# EAGLE board supply LF (EAGLE 7.1.0)
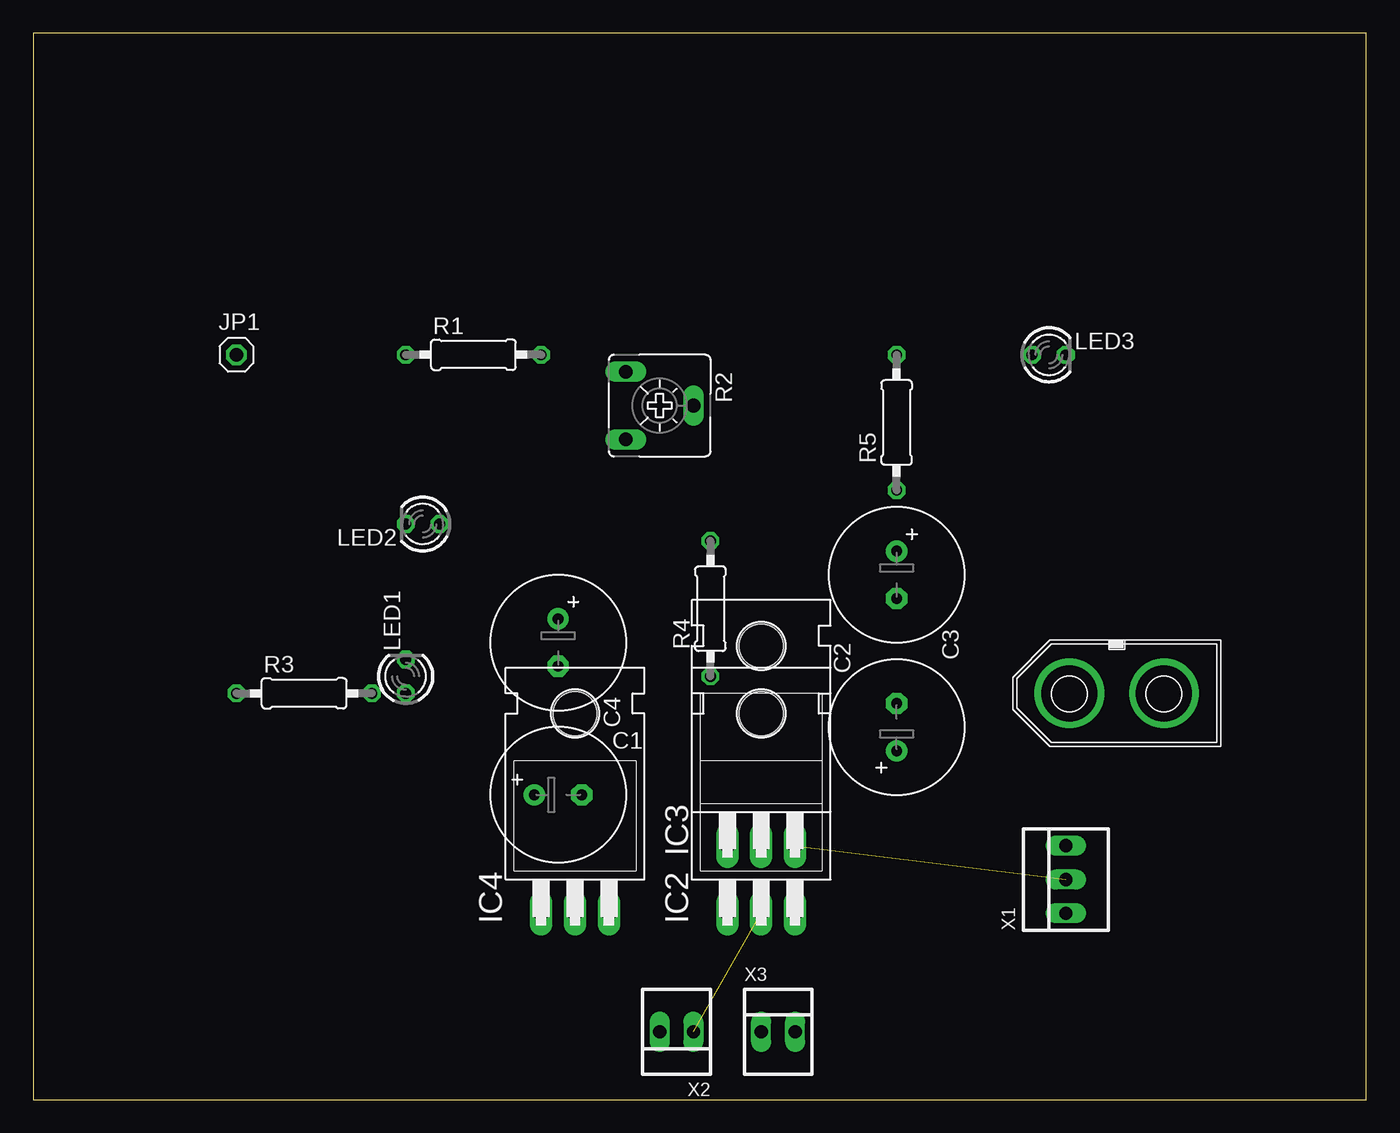
[diagram p0: board, top side]
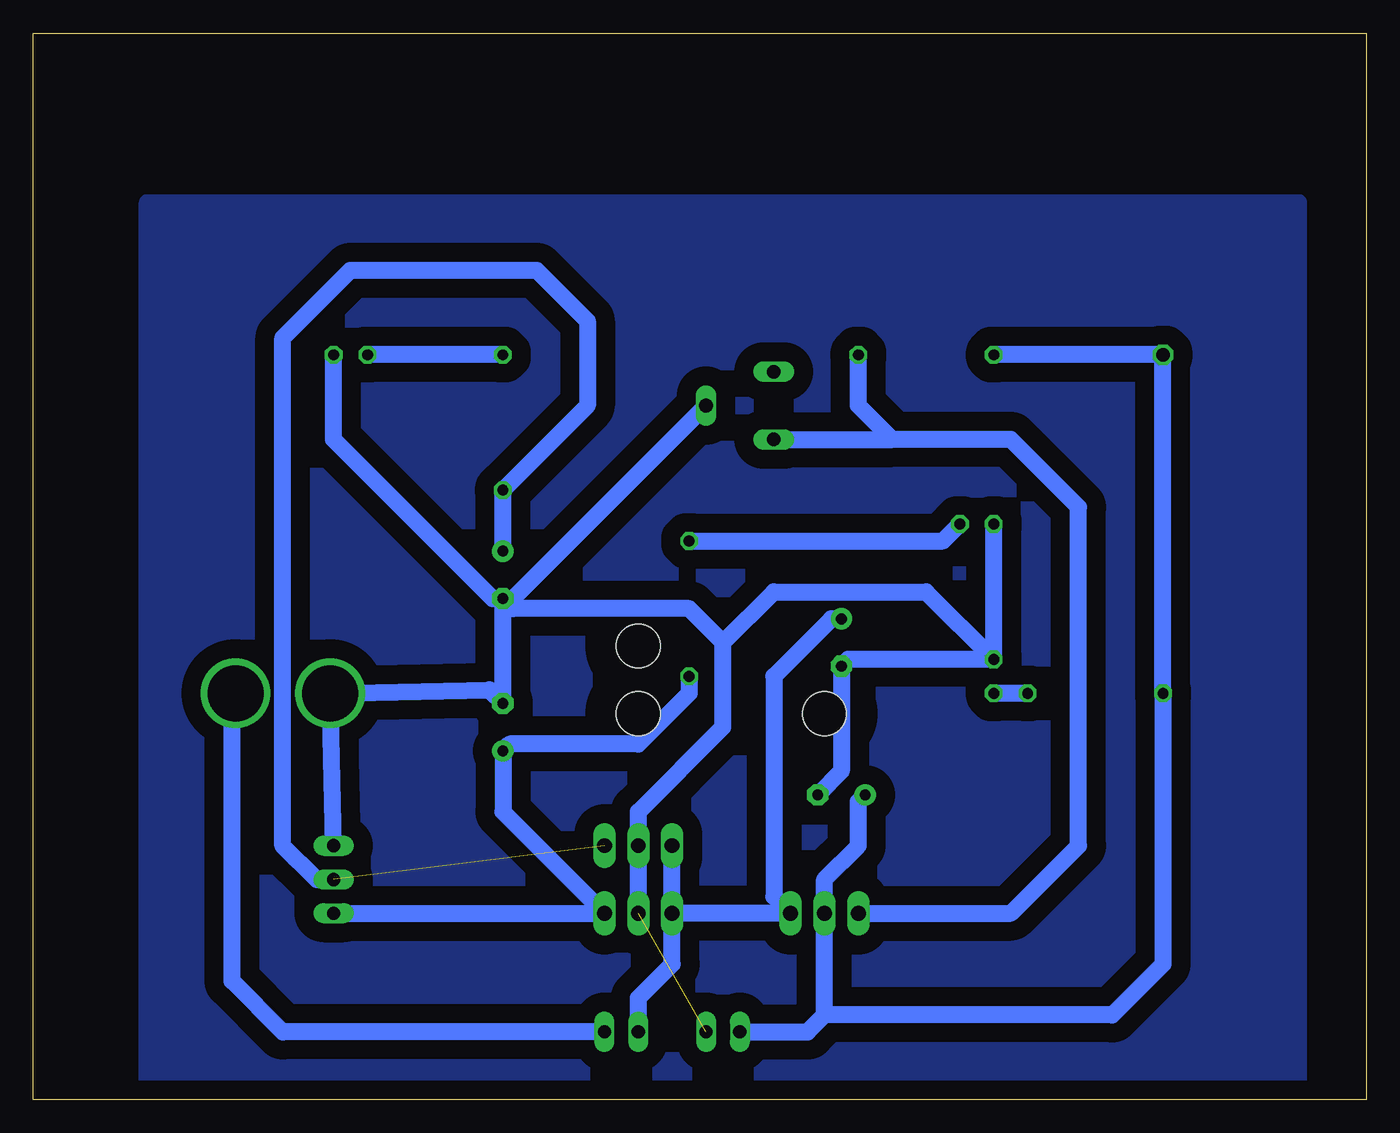
[diagram p1: board, bottom side, seen from below]

Size 100 x 80 mm. Coordinates in mm from the lower left corner, seen from the top.
Outline: 0,0 100,0 100,80 0,80 0,0
Copper layers (1*16): Top 0.035mm / dielectric 1.5mm / Bottom 0.035mm
Design rules "default": minimum track width 10mil, minimum drill 24mil, track to track 8mil, track to pad 8mil, pad to pad 8mil, via to via 8mil, smd to smd 8mil, copper to edge 40mil, drill to drill 8mil, minimum pad ring 10mil, minimum via ring 8mil, stop-mask expansion 4mil, vias tented up to drill 0mil, thermal gap 10mil

## Footprints (pad centres in the part's own frame; a part is rotated, then mirrored left to right if it is on the bottom)
E3,5-10 = drill 0.813 pad 1.6: + -1.778,0 | drill 0.813 pad 1.6 octagon: - 1.778,0
TO220H = drill 1.118 long: 1 -2.54,-10.16; 2 0,-10.16; 3 2.54,-10.16 | hole 3.302: 0,4.826
1X01 = drill 1.016 octagon: 1 0,0
LED3MM = drill 0.813 octagon: A -1.27,0; K 1.27,0
0207/10 = drill 0.813 octagon: 1 -5.08,0; 2 5.08,0
CA6V = drill 1.016 long: A -2.54,-2.54; E 2.54,-2.54; S 0,2.54
CON-XT60M = drill 4.2: V+ -3.55,0; V- 3.55,0
22-23-2031 = drill 1 long: 1 -2.54,0; 2 0,0; 3 2.54,0
22-23-2021 = drill 1 long: 1 -1.27,0; 2 1.27,0

## Placement (x,y rotation side)
C1  1000uF/16V  [E3,5-10]  39.37,22.86 0 top
C2  1000uF/16V  [E3,5-10]  64.77,27.94 90 top
C3  1000uF/16V  [E3,5-10]  64.77,39.37 270 top
C4  1000uF/16V  [E3,5-10]  39.37,34.29 270 top
IC2  7805T  [TO220H]  54.61,24.13 0 top
IC3  7805T  [TO220H]  54.61,29.21 0 top
IC4  317T  [TO220H]  40.64,24.13 0 top
JP1  [1X01]  15.24,55.88 0 top
LED1  [LED3MM]  27.94,31.75 90 top
LED2  [LED3MM]  29.21,43.18 180 top
LED3  [LED3MM]  76.2,55.88 0 top
R1  1K2  [0207/10]  33.02,55.88 0 top
R2  20K  [CA6V]  46.99,52.07 270 top
R3  1K  [0207/10]  20.32,30.48 0 top
R4  1K  [0207/10]  50.8,36.83 90 top
R5  1K  [0207/10]  64.77,50.8 90 top
VIN  [CON-XT60M]  81.28,30.48 180 top
X1  VSYS  [22-23-2031]  77.47,16.51 90 top
X2  VMOT  [22-23-2021]  48.26,5.08 180 top
X3  switch  [22-23-2021]  55.88,5.08 0 top

## Library data of the parts
C1-C4 R1 R3-R5 = rcl
IC2-IC4 = linear
JP1 = pinhead
LED1-LED3 = led
R2 = pot
VIN = con-XT60M
X1 = con-molex; MF: MOLEX; MPN: 22-23-2031; OC_FARNELL: 1462950; OC_NEWARK: 30C0862
X2 X3 = con-molex; MF: MOLEX; MPN: 22-23-2021; OC_FARNELL: 1462926; OC_NEWARK: 25C3832

## Nets
+12V: C3.+ IC3.3 R5.1 X1.2
GND: C1.- C2.- C3.- C4.- IC2.2 IC3.2 LED1.K LED2.K LED3.K R2.S VIN.V- X1.3 X2.1
N$1: IC4.1 R1.2 R2.E
N$2: LED1.A R3.2
N$3: LED3.A R5.2
N$4: VIN.V+ X3.2
N$5: LED2.A R4.2
VCC: C2.+ IC2.3 R4.1 X1.1
VDD: C1.+ IC4.2 JP1.1 R1.1 R3.1 X2.2
VPP: C4.+ IC2.1 IC3.1 IC4.3 X3.1

## Tracks (layer width: path | path; a pad name or v marks a point on that pad's centre or on a via)
+12V  (1 unrouted)
  Bottom 1.27: C3.+ R5.1 58.42,52.07 58.42,58.42 62.23,62.23 76.2,62.23 81.28,57.15 81.28,19.05 78.74,16.51 X1.2
GND  (1 unrouted)
  Bottom 1.27: LED1.K LED2.K | LED1.K 38.86,33.02 C4.- 39.37,24.64 C1.- | IC2.2 IC3.2 54.61,21.59 48.26,27.94 48.26,34.29 | X1.3 VIN.V- 65.79,30.74 C2.- 64.77,36.83 | 64.77,36.83 C3.- | C3.- 65.53,37.59 77.47,49.53 LED3.K | 48.26,34.29 50.8,36.83 64.01,36.83 C3.- | R2.S 64.77,36.83 | 48.26,34.29 44.45,38.1 33.02,38.1 LED1.K
N$1
  Bottom 1.27: IC4.1 26.67,13.97 21.59,19.05 21.59,44.45 26.67,49.53 35.56,49.53 | 35.56,49.53 38.1,52.07 R1.2 | R2.E 35.56,49.53
N$2
  Bottom 1.27: R3.2 LED1.A
N$3
  Bottom 1.27: R5.2 LED3.A
N$4
  Bottom 1.27: X3.2 81.28,5.08 85.09,8.89 85.09,30.22 VIN.V+
N$5
  Bottom 1.27: R4.2 31.75,41.91 LED2.A
N$6
  pour Bottom (isolate 1.422): 5.08,66.04 5.08,0 91.44,0 91.44,67.31 5.08,67.31
VCC
  Bottom 1.27: X1.1 IC2.3 64.77,21.59 C2.+ 64.26,26.67 54.61,26.67 50.8,30.48 R4.1
VDD
  Bottom 1.27: X2.2 41.91,5.08 40.64,6.35 | 40.64,6.35 IC4.2 40.64,16.51 38.1,19.05 38.1,22.35 C1.+ | 40.64,6.35 19.05,6.35 15.24,10.16 R3.1 JP1.1 R1.1
VPP
  Bottom 1.27: IC2.1 IC4.3 44.45,15.24 44.45,31.75 40.13,36.07 C4.+ | X3.1 54.61,7.62 52.07,10.16 IC2.1 | IC2.1 IC3.1